# EAGLE board BU1_BigClown_WiFi_module (EAGLE 9.0.0)
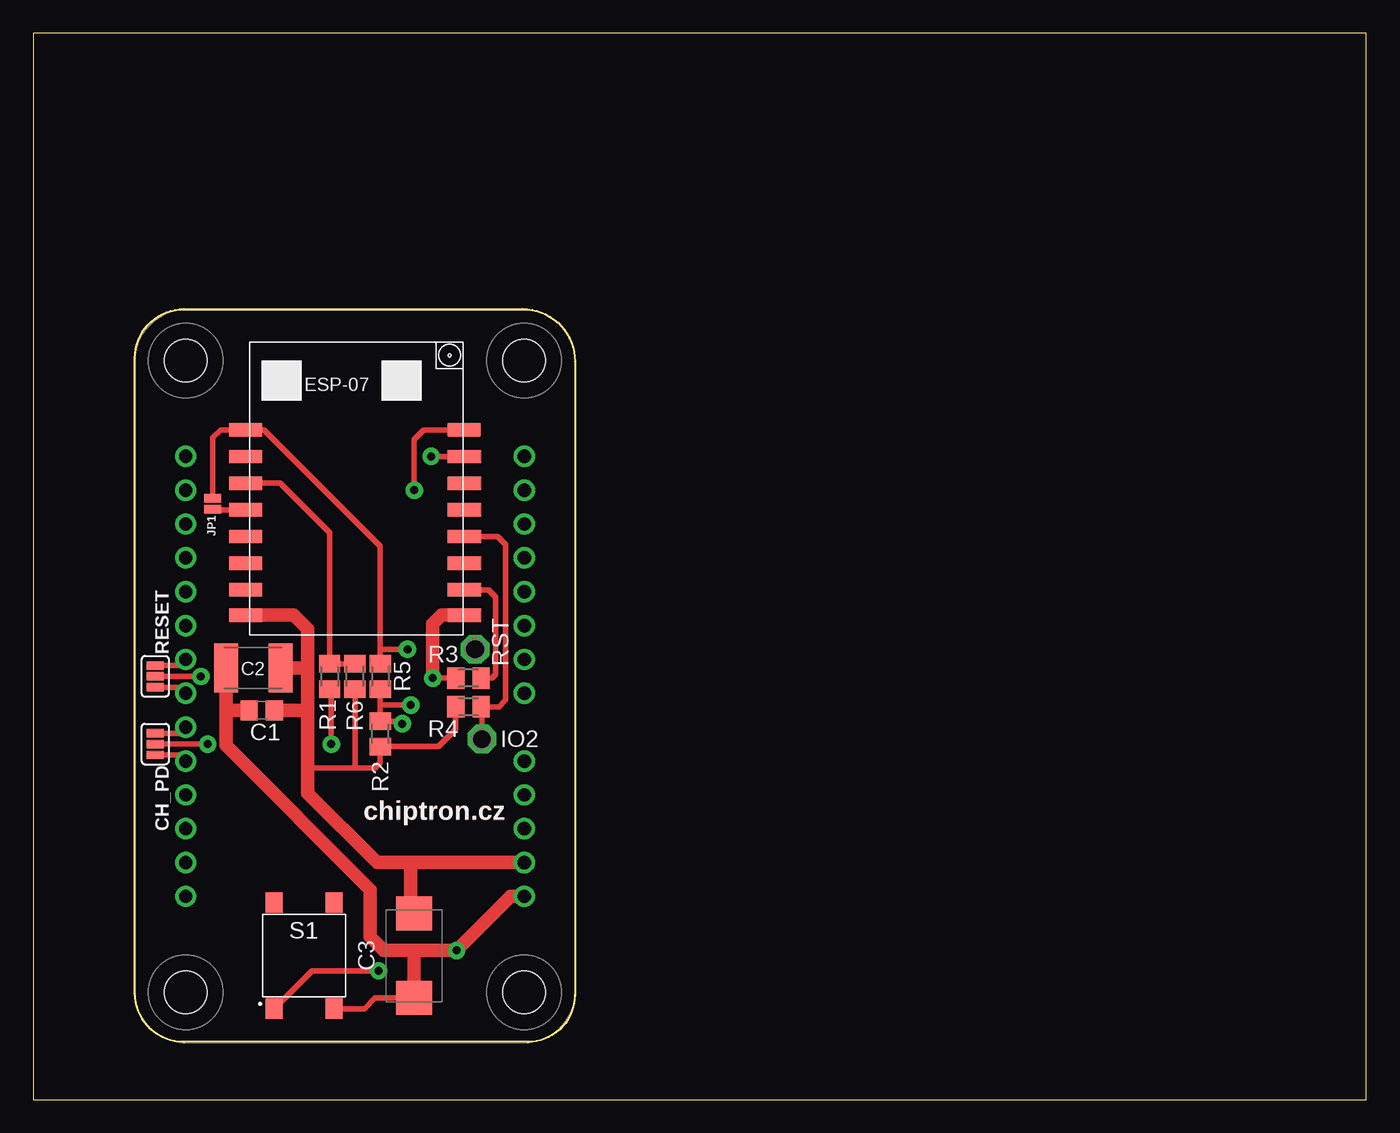
[diagram p0: board, top side]
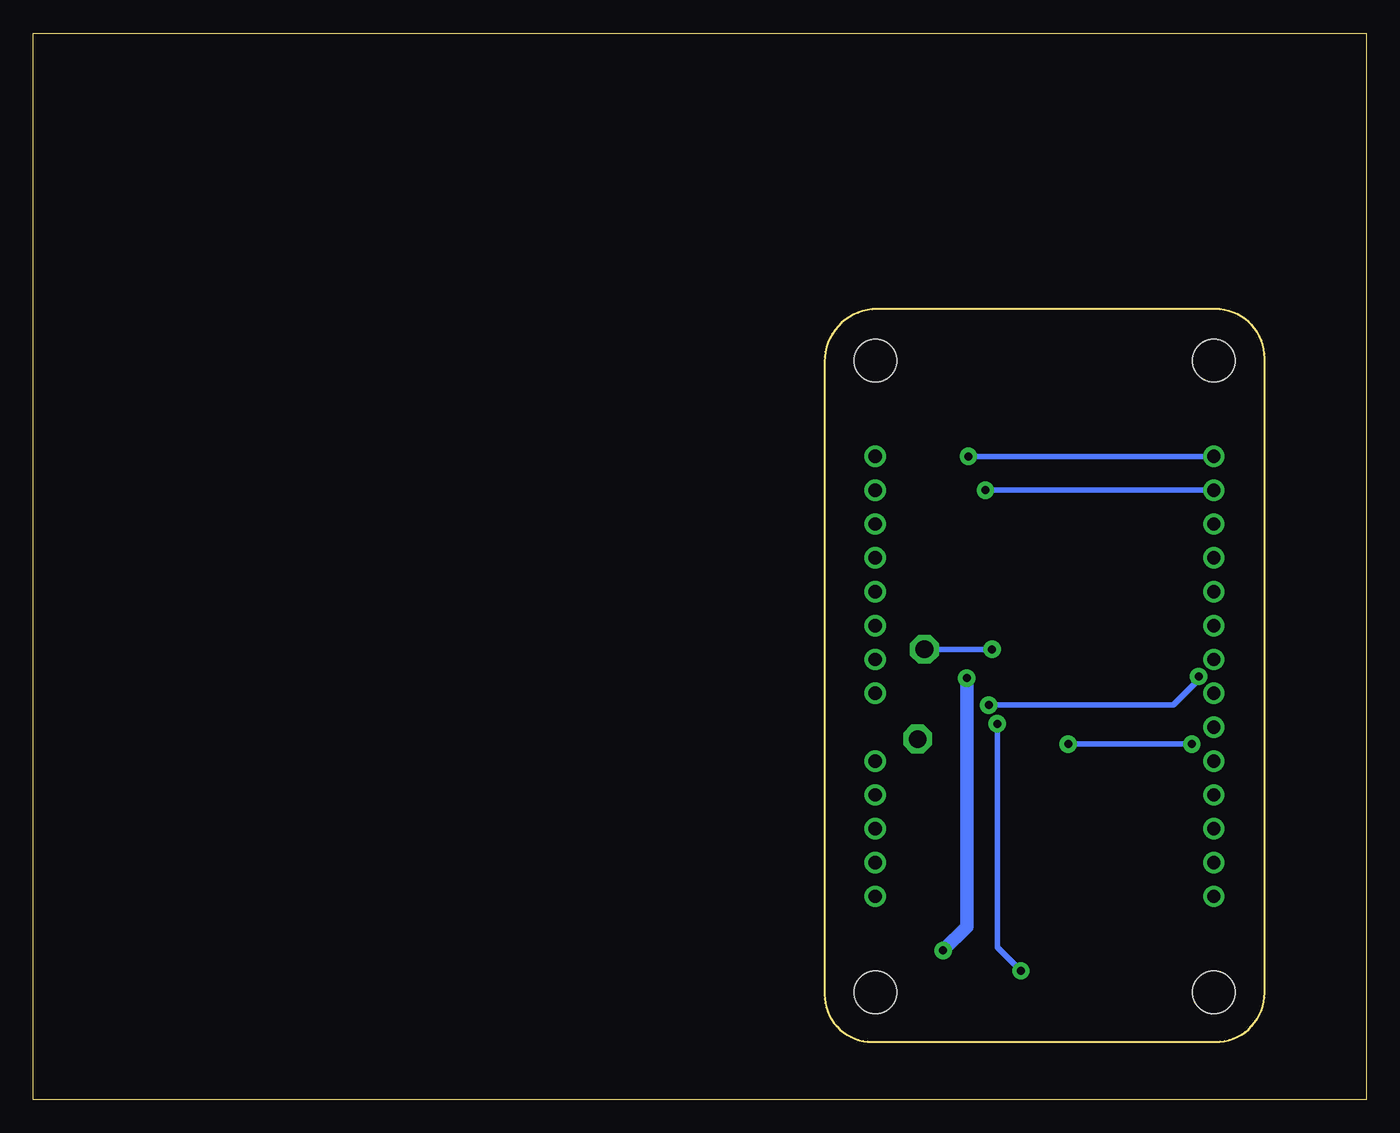
[diagram p1: board, bottom side, seen from below]

Size 100 x 80 mm. Coordinates in mm from the lower left corner, seen from the top.
Outline: 0,0 100,0 100,80 0,80 0,0
Copper layers (1*16): Top 0.035mm / dielectric 1.5mm / Bottom 0.035mm
Design rules "default": minimum track width 6mil, minimum drill 0.35mm, track to track 6mil, track to pad 6mil, pad to pad 6mil, via to via 6mil, smd to smd 6mil, copper to edge 40mil, drill to drill 6mil, minimum pad ring 10mil, minimum via ring 8mil, stop-mask expansion 4mil, vias tented up to drill 0mil, thermal gap 10mil
Milling: 8 lines

## Footprints (pad centres in the part's own frame; a part is rotated, then mirrored left to right if it is on the bottom)
C0805 = smd 1.3 x 1.5: 1 -0.95,0; 2 0.95,0
C1812K = smd 1.8 x 3.7: 1 -2.05,0; 2 2.05,0
D/7343-31R = smd 2.55 x 2.7: + 3.175,0; - -3.175,0
SMT-JUMPER_3_1-NC_PASTE_SILK = smd 0.635 x 1.27: 1 -0.813,0; 2 0,0; 3 0.813,0
P1-13 = drill 1.321 pad 2.159 octagon: TP 0,0
SMT-JUMPER_2_NO_NO-SILK = smd 0.635 x 1.27: 1 -0.406,0; 2 0.406,0
BC-MODULE-CORE = drill 1 pad 1.6: 1 -12.7,16.51; 2 -12.7,13.97; 3 -12.7,11.43; 4 -12.7,8.89; 5 -12.7,6.35; 6 -12.7,3.81; 7 -12.7,1.27; 8 -12.7,-1.27; 9 -12.7,-3.81; 10 -12.7,-6.35; 11 -12.7,-8.89; 12 -12.7,-11.43; 13 -12.7,-13.97; 14 -12.7,-16.51; 15 12.7,-16.51; 16 12.7,-13.97; 17 12.7,-11.43; 18 12.7,-8.89; 19 12.7,-6.35; 21 12.7,-1.27; 22 12.7,1.27; 23 12.7,3.81; 24 12.7,6.35; 25 12.7,8.89; 26 12.7,11.43; 27 12.7,13.97; 28 12.7,16.51 | hole 3.2: -12.7,23.7; 12.7,23.7; -12.7,-23.7; 12.7,-23.7
M0805 = smd 1.3 x 1.6: 1 -0.95,0; 2 0.95,0
430152043826 = smd 1.55 x 1.3: 1 -3.975,2.25; 2 -3.975,-2.25; 3 3.975,2.25; 4 3.975,-2.25
ESP07-16PIN = smd 2.5 x 1: ADC -8.2,3.8; CH_PD -8.2,1.8; GND 8.2,-8.105; GPIO0 8.2,-2.2; GPIO2 8.2,-4.2; GPIO4 8.2,1.8; GPIO5 8.2,-0.2; GPIO12 -8.2,-4.2; GPIO13 -8.2,-6.2; GPIO14 -8.2,-2.2; GPIO15 8.2,-6.2; GPIO16 -8.2,-0.2; REST -8.2,5.8; RX 8.2,3.8; TX 8.2,5.8; VCC -8.2,-8.105

## Placement (x,y rotation side)
C1  100n  [C0805]  17.14,29.21 180 top
C2  4u7  [C1812K]  16.51,32.38 180 top
C3  330u  [D/7343-31R]  28.57,10.79 90 top
CH_PD  JUMPER-SMT_3_1-NC_PASTE_SILK  [SMT-JUMPER_3_1-NC_PASTE_SILK]  9.14,26.67 270 top
IO2  PTR1PAD1-13  [P1-13]  33.66,27.05 0 top
JP1  JUMPER-SMT_2_NO_NO-SILK  [SMT-JUMPER_2_NO_NO-SILK]  13.46,44.7 270 top
JP3  BC-MODULE-CORE  [BC-MODULE-CORE]  24.13,31.75 0 top
R1  10k  [M0805]  22.23,31.75 90 top
R2  10k  [M0805]  26.04,27.43 270 top
R3  10k  [M0805]  32.64,31.62 0 top
R4  10k  [M0805]  32.64,29.46 0 top
R5  10k  [M0805]  26.04,31.75 90 top
R6  10k  [M0805]  24.13,31.75 270 top
RESET  JUMPER-SMT_3_1-NC_PASTE_SILK  [SMT-JUMPER_3_1-NC_PASTE_SILK]  9.14,31.75 270 top
RST  PTR1PAD1-13  [P1-13]  33.15,33.78 0 top
S1  [430152043826]  20.32,10.79 90 top
U$1  ESP07-16PIN  [ESP07-16PIN]  24.13,44.45 0 top

## Library data of the parts
C1-C3 = rcl; SPICEPREFIX: C
CH_PD JP1 RESET = SparkFun-Jumpers
IO2 RST = testpad
JP3 = bigclown
R1-R6 = rcl; SPICEPREFIX: R
S1 = Wurth_Elektronik_Electromechanic_Switch_rev17c
U$1 = esp8266modules; DIMENSIONS: 22.0 x 16.0 mm; PINS: 16; PITCH: 0.078" / 2 mm

## Nets
CH_PD: CH_PD.2 R1.1
GND: C1.2 C2.2 C3.- JP3.15 R3.1 S1.2 U$1.GND
N$1: R1.2 R6.1 U$1.CH_PD
N$2: IO2.TP R4.2 U$1.GPIO0
N$3: R3.2 U$1.GPIO15
N$4: JP1.1 R5.2 RST.TP U$1.REST
N$5: JP1.2 U$1.GPIO16
P6: JP3.7 RESET.1
P7: JP3.8 RESET.3
P8: CH_PD.1 JP3.9
P9: CH_PD.3 JP3.10
RESET: R2.1 R5.1 RESET.2 S1.1
RX: JP3.1 U$1.RX
TX: JP3.2 U$1.TX
VCC: C1.1 C2.1 C3.+ JP3.16 R2.2 R4.1 R6.2 U$1.VCC

## Tracks (layer width: path | path; a pad name or v marks a point on that pad's centre or on a via)
CH_PD  (via drill 0.6 pad 1.3)
  Top 0.406: CH_PD.2 v13.08,26.67 | v22.35,26.67 22.35,30.67 R1.1
  Bottom 0.406: v13.08,26.67 v22.35,26.67
GND  (via drill 0.6 pad 1.3)
  Top 0.406: S1.2 24.85,6.82 25.65,7.62 C3.- | R3.1 v29.97,31.62
  Top 1.016: C2.2 14.46,29.21 | 14.46,29.21 14.46,26.56 25.27,15.75 25.27,12.19 26.29,11.18 28.7,11.18 | 28.7,11.18 v31.75,11.18 35.81,15.24 JP3.15 | C3.- 28.57,11.05 28.7,11.18 | C1.2 14.46,29.21 | U$1.GND 30.63,36.34 29.97,35.69 v29.97,31.62
  Bottom 1.016: v29.97,31.62 29.97,12.95 v31.75,11.18
N$1
  Top 0.406: U$1.CH_PD 18.52,46.25 22.23,42.55 R1.2 R6.1
N$2
  Top 0.406: U$1.GPIO0 34.84,42.25 35.43,41.66 35.43,29.97 34.92,29.46 R4.2 33.66,29.4 IO2.TP
N$3
  Top 0.406: U$1.GPIO15 34.14,38.25 34.67,37.72 34.67,31.88 34.42,31.62 R3.2
N$4  (via drill 0.6 pad 1.3)
  Top 0.406: v28.07,33.78 26.16,33.78 26.04,33.66 | 26.04,33.66 R5.2 | 26.04,33.66 26.04,41.53 17.31,50.25 U$1.REST 14.05,50.25 13.46,49.66 JP1.1
  Bottom 0.406: RST.TP v28.07,33.78
N$5
  Top 0.406: JP1.2 13.51,44.25 U$1.GPIO16
P6
  Top 0.406: RESET.1 10.97,32.56 JP3.7
P7
  Top 0.406: RESET.3 10.97,30.94 JP3.8
P8
  Top 0.406: CH_PD.1 10.97,27.48 JP3.9
P9
  Top 0.406: CH_PD.3 10.97,25.86 JP3.10
RESET  (via drill 0.6 pad 1.3)
  Top 0.406: R5.1 26.04,29.59 | 26.04,29.59 R2.1 27.5,28.38 v27.69,28.19 | 26.04,29.59 v28.32,29.59 | v12.57,31.75 RESET.2 | S1.1 20.9,9.65 v25.91,9.65
  Bottom 0.406: v28.32,29.59 14.48,29.59 12.32,31.75 v12.57,31.75 | v27.69,28.19 27.69,11.43 v25.91,9.65
RX  (via drill 0.6 pad 1.3)
  Top 0.406: v29.84,48.26 U$1.RX
  Bottom 0.406: JP3.1 v29.84,48.26
TX  (via drill 0.6 pad 1.3)
  Top 0.406: v28.57,45.72 28.57,49.53 29.3,50.25 U$1.TX
  Bottom 0.406: JP3.2 v28.57,45.72
VCC
  Top 0.406: 24,24.89 25.65,24.89 26.04,25.27 R2.2 30.42,26.48 31.69,27.75 R4.1 | 24,24.89 20.57,24.89 | R6.2 24.13,25.02 24,24.89
  Top 1.016: U$1.VCC 19.54,36.34 20.57,35.31 20.57,32.38 | 20.57,32.38 20.57,29.21 | 20.57,29.21 20.57,24.89 20.57,22.99 25.78,17.78 28.32,17.78 | 28.32,17.78 JP3.16 | C3.+ 28.32,14.22 28.32,17.78 | C2.1 20.57,32.38 | C1.1 20.57,29.21

## Text on the board
Top: chiptron.cz
tNames: chiptron.cz